# Altium PCB ECE453.PcbDoc
Units mil, origin at the board's own origin, x right, y up, seen from the top; angles counter-clockwise.
Board outline 3403.73 x 2710.03 mil, 2 copper layers (Top Layer, Bottom Layer); 33 components, 17 nets, 73 pads, 10 vias.
Unrouted connection lines stored in the file: 41.
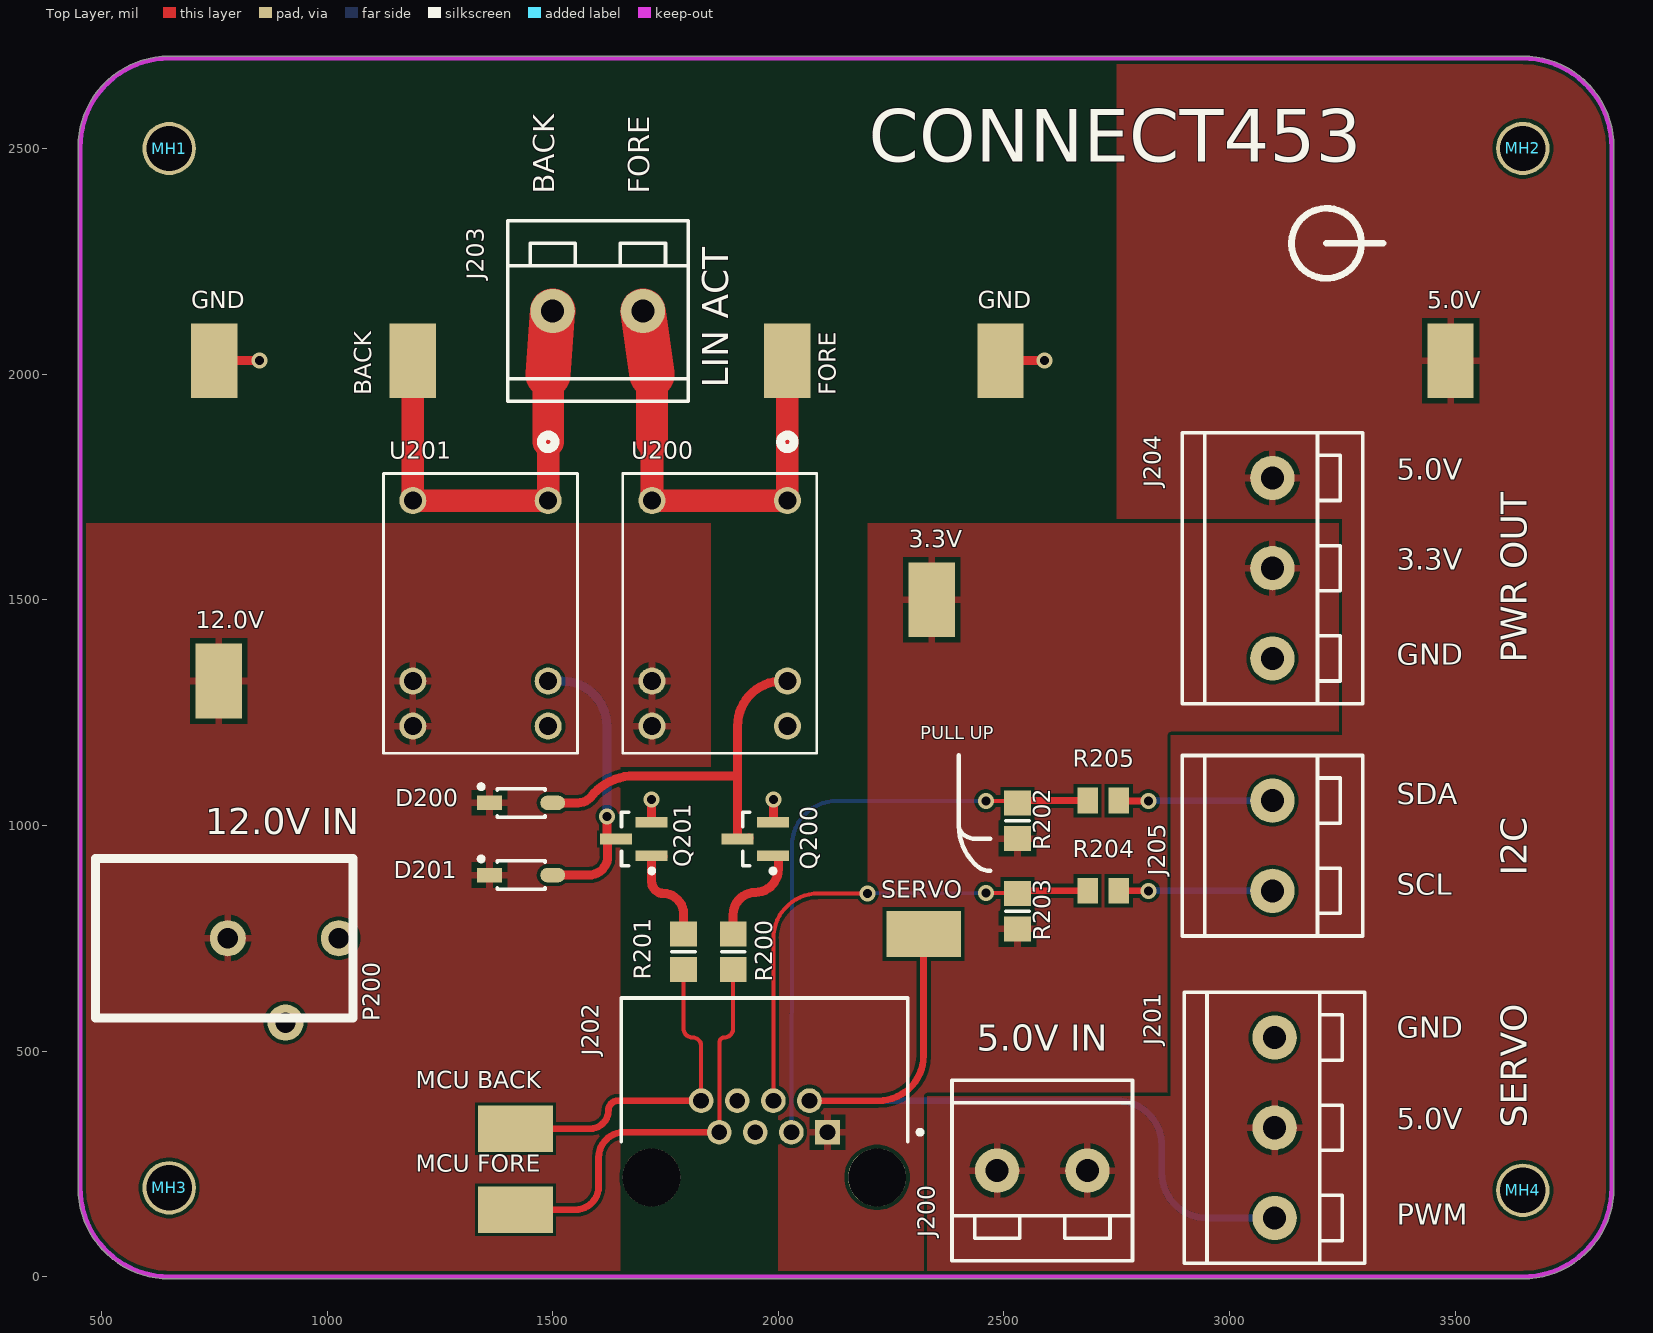
[diagram p0: Top Layer view]
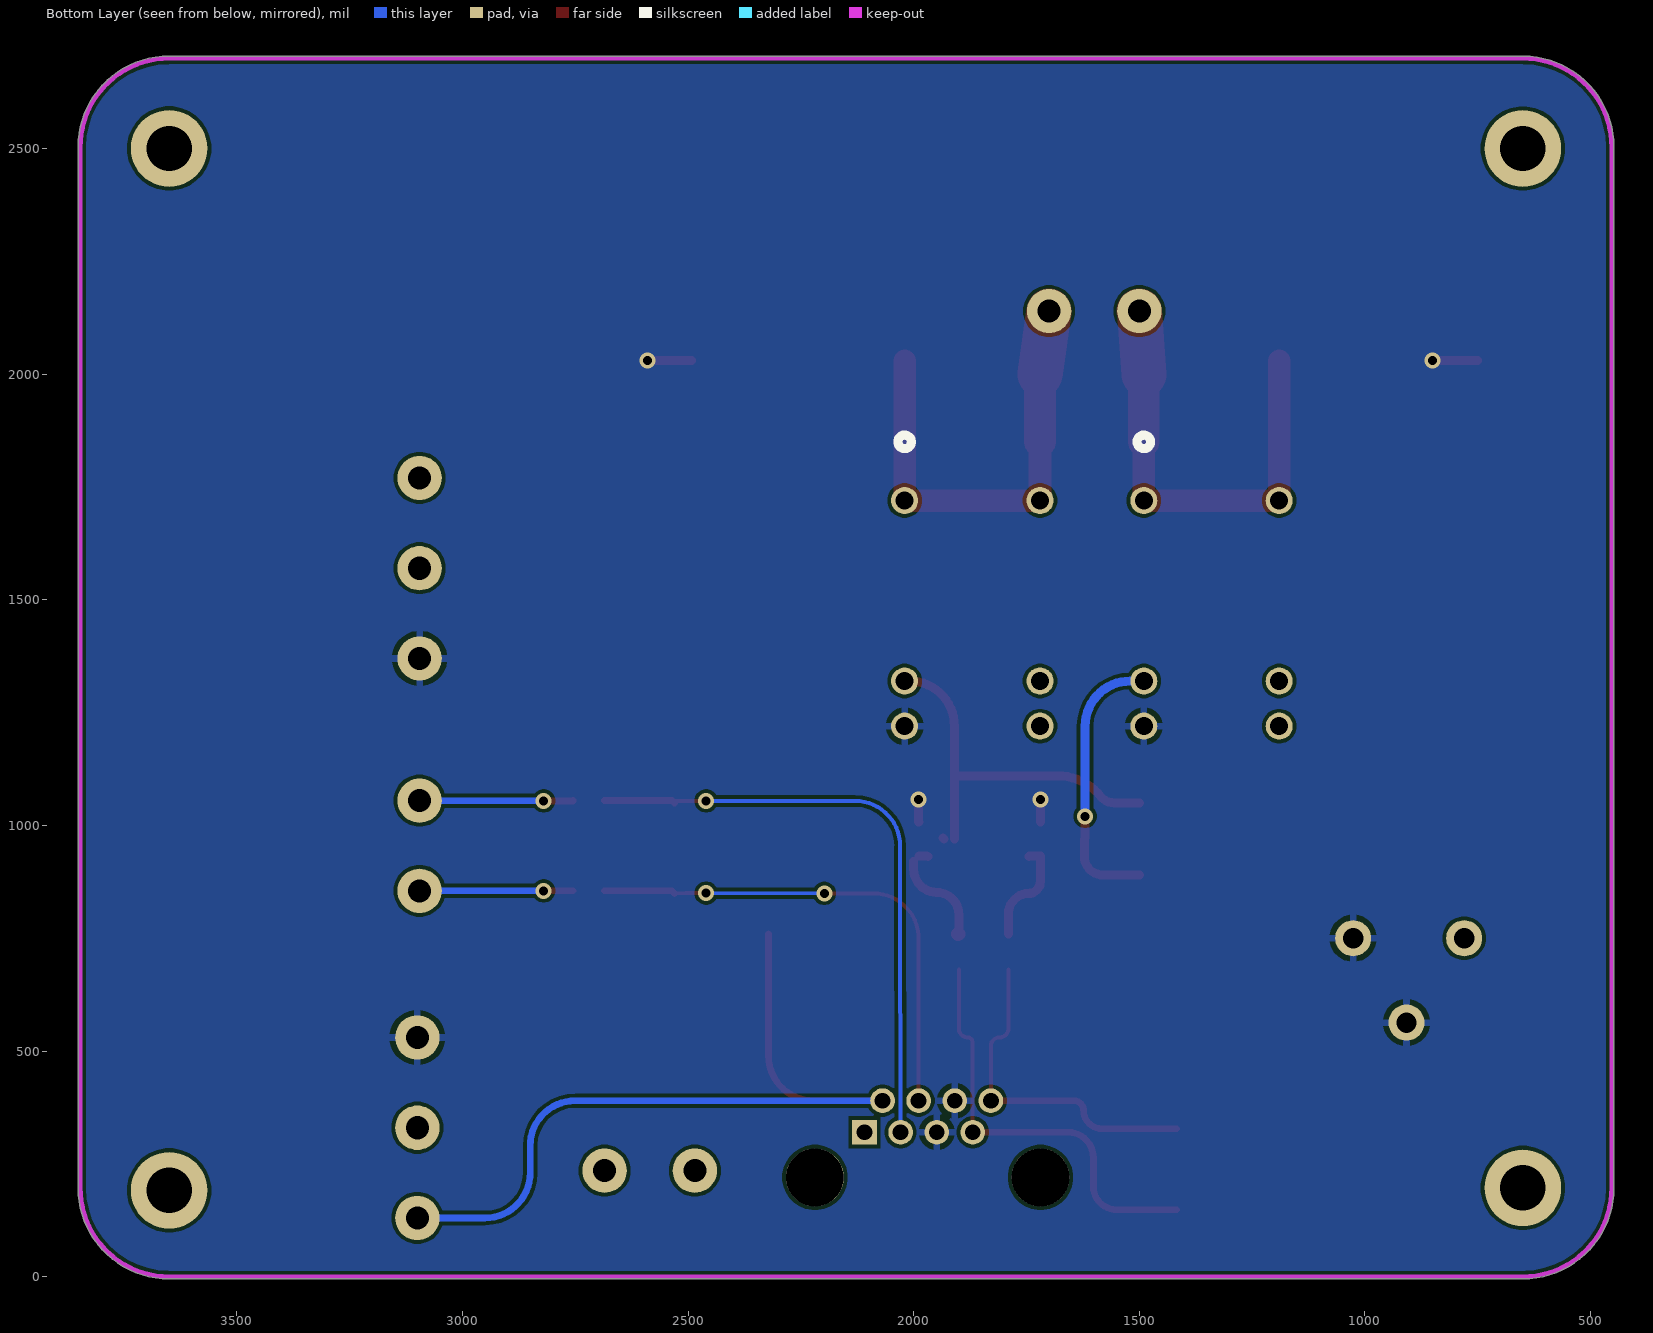
[diagram p1: Bottom Layer view, seen from below]

## Layer stack, top to bottom
Top Solder: solder mask 0.4, Solder Resist, Dk 3.5
Top Layer: signal copper 1.4
Dielectric1: dielectric 12.6, FR-4, Dk 4.8
Bottom Layer: signal copper 1.4
Bottom Solder: solder mask 0.4, Solder Resist, Dk 3.5

## Board outline
448.13,196.85 ccw(c650,196.85) 650,-5.01 3650,-5.01 ccw(c3650,196.85) 3851.87,196.85 3851.86,2503.03 3851.87,2503.15 ccw(c3650,2503.15) 3650,2705.01 650,2705.01 648.77,2704.86 ccw(c650,2503) 448.13,2503 448.18,2502.29

## Design rules (kind name [scope] priority, off if disabled: settings)
Clearance Polygon_Clearance [All vs InPolygon] p1: gap=7.87 ignorepadtopadclearanceinfootprint=FALSE
Clearance [All] p2: gap=7.87 ignorepadtopadclearanceinfootprint=TRUE
ComponentClearance [InComponent('U3')] p1: gap=0 collisioncheckmode=3 verticalgap=10 showdistances=FALSE
Height [All] p1: minheight=0 maxheight=2952.76 prefheight=500
HoleSize [All] p1: absolutevalues=TRUE maxlimit=250 minlimit=11.81 maxpercent=80.000 minpercent=20.000
MinimumAnnularRing [All] p1: minimumring=5.91
MinimumSolderMaskSliver [All] p1: minsoldermaskwidth=8.66
NetAntennae NetAntennae_5.0V [InNet('5.0V')] p1: netantennaetolerance=0
NetAntennae NetAntennae_3.3V [InNet('3.3V')] p2: netantennaetolerance=0
PlaneClearance [All] p1: clearance=11.81
PlaneConnect [All] p1: planeconnectstyle=Relief reliefexpansion=11.81 reliefentries=4 reliefconductorwidth=11.81 reliefairgap=11.81
PolygonConnect ViaConnect [All vs IsVia] p1: connectstyle=Direct reliefconductorwidth=15 reliefentries=4 polygonreliefangle="90 Angle" airgapwidth=10
PolygonConnect [All] p2: connectstyle=Relief reliefconductorwidth=15.75 reliefentries=4 polygonreliefangle="90 Angle" airgapwidth=11.81
RoutingVias [All] p1: holewidth=11.81 width=23.62 viastyle="Through Hole" minholewidth=11.81 minwidth=23.62 maxholewidth=196.85 maxwidth=393.7
SilkToSilkClearance [All] p1: silktosilkclearance=0
SilkToSolderMaskClearance [IsPad] p1: minsilkscreentomaskgap=0 clearancetoexposedcopper=TRUE
SolderMaskExpansion [All] p1: expansion=4 istentingtop=FALSE
UnConnectedPin [All] p1:
Width [All] p1: maxlimit=393.7 minlimit=7.87 preferedwidth=23.62
21 further rules are at their usual default settings.

## Classes and differential pairs
component class 04_Mechanical: MH1 MH2 MH3 MH4

## Components (designator, comment, footprint, x,y, rotation, side; value= is the part's Value field where it differs from the comment)
3.3V "TP_1206" TP-SMC-1206 2340,1500 r90 top (schematic designator TP208)
5.0V "TP_1206" TP-SMC-1206 3490,2030 r90 top (schematic designator TP207)
12.0V "TP_1206" TP-SMC-1206 760,1320 r90 top (schematic designator TP209)
BACK "TP_1206" TP-SMC-1206 1190,2030 r90 top (schematic designator TP203)
D200 "SM5817PL-TP" On_Semiconductor_425-04_IPC_A 1430,1050 r0 top
D201 "SM5817PL-TP" On_Semiconductor_425-04_IPC_A 1430,890 r0 top
FORE "TP_1206" TP-SMC-1206 2020,2030 r90 top (schematic designator TP201)
GND "TP_1206" TP-SMC-1206 750,2030 r90 top (schematic designator TP206)
GND "TP_1206" TP-SMC-1206 2492.6,2030 r90 top (schematic designator TP205)
J200 "5.0V IN" PHOENIX2X0.2 2585,235 r0 top
J201 "Servo" PHOENIX3X0.2 3100,330 r90 top
J202 "RJHSE-5080" FP-RJHSE-5080-MFG 1969,315 r0 top
J203 "Linear Actuator" PHOENIX2X0.2 1600,2140 r180 top
J204 "I2C" PHOENIX3X0.2 3095,1570 r90 top
J205 "I2C" PHOENIX2X0.2 3095,955 r90 top
"MCU BACK" "TP_1206" TP-SMC-1206 1417.57,327.87 r180 top (schematic designator TP204)
"MCU FORE" "TP_1206" TP-SMC-1206 1417.57,148.15 r180 top (schematic designator TP202)
MH1 "MHOLE_2_55MM" MHOLE_2_55MM#1 196.85,3740.16 r0 top locked
MH2 "MHOLE_2_55MM" MHOLE_2_55MM#2 3740.16,3740.16 r0 top locked
MH3 "MHOLE_2_55MM" MHOLE_2_55MM#3 196.85,196.85 r0 top locked
MH4 "MHOLE_2_55MM" MHOLE_2_55MM#4 3740.16,191.24 r0 top locked
P200 "PJ-102" PJ-102 1026.05,750 r90 top value=CP-102AD
Q200 "2N3904" SOT23-3M 1949,970 r180 top
Q201 "2N3904" SOT23-3M 1680,970 r180 top
R200 "10K" RESC2012M 1900,720 r90 top value=1K
R201 "10K" RESC2012M 1790,720 r90 top value=1K
R202 "10K" RESC2012M 2530,1010 r270 top
R203 "10K" RESC2012M 2530,810 r270 top
R204 "ERJ-6GEY0R00V" RESC2013X70X40NL20T20 2720,855 r0 top value=0R
R205 "ERJ-6GEY0R00V" RESC2013X70X40NL20T20 2720,1055 r0 top value=0R
SERVO "TP_1206" TP-SMC-1206 2321.97,759.37 r180 top (schematic designator TP200)
U200 "J1021CS312VDC.20" RELAY6_J1021CS312VDC.20_CRS 2020,1720 r270 top
U201 "J1021CS312VDC.20" RELAY6_J1021CS312VDC.20_CRS 1490,1720 r270 top

## Footprints (in the part's own frame and the unit in brackets; to place one, negate y for a bottom-side part, rotate by r counter-clockwise, add the part's x,y. Pads: shape width x height; smd on the part's side, far side on the other; paste and mask are expansions set on the pad)
FP-RJHSE-5080-MFG [mm]
  rect 1.39x1.39 hole 0.89 paste-1000 mask+0: 1(3.556,0.127)
  round 1.39 hole 0.89 paste-1000 mask+0: 2(2.54,1.905) 3(1.524,0.127) 4(0.508,1.905) 5(-0.508,0.127) 6(-1.524,1.905) 7(-2.54,0.127) 8(-3.556,1.905)
  round 3.25 hole 3.25 unplated paste-1000 mask+0: ""(-6.35,-2.413) ""(6.35,-2.413)
  silkscreen extent -8.06,-0.41 8.89,7.68, body extent -8.16,-7.78 8.16,7.78, height 0.25
MHOLE_2_55MM#1 [mm]
  round 3 / inner round 4.572 / far side round 4.318 hole 2.55: 1(11.51,-31.496)
MHOLE_2_55MM#2 [mm]
  round 3 / inner round 4.572 / far side round 4.318 hole 2.55: 1(-2.29,-31.49)
MHOLE_2_55MM#3 [mm]
  round 3 / inner round 4.572 / far side round 4.318 hole 2.55: 1(11.51,0)
MHOLE_2_55MM#4 [mm]
  round 3 / inner round 4.572 / far side round 4.318 hole 2.55: 1(-2.29,0)
On_Semiconductor_425-04_IPC_A [mm]
  rect 1.408x0.822 smd paste+0 mask+0: 1(-1.78,0)
  rrect100% 1.408x0.822 smd paste+0 mask+0: 2(1.78,0)
  silkscreen extent -2.37,-0.8 1.35,1.04, body extent -2.98,-1.3 2.98,1.3, height 0.25
PHOENIX2X0.2 [mm]
  round 2.5 hole 1.295: 1(-2.54,0) 2(2.54,0)
  silkscreen extent -5.08,-5.08 5.08,5.08, body extent -5.48,-5.59 5.48,5.71, height 18.05
PHOENIX3X0.2 [mm]
  round 2.5 hole 1.3: 1(-5.08,0) 2(0,0) 3(5.08,0)
  silkscreen extent -7.62,-5.08 7.62,5.08, body extent -7.99,-5.64 8.05,5.66, height 18.05
PJ-102 [mil]
  round 80 hole 45: 1(0,0) 2(0,246.05) 3(-187,118.1)
  silkscreen extent -177,-31 177,539, body extent -190,-20 180,547, height 435
RELAY6_J1021CS312VDC.20_CRS [mil]
  round 60 hole 40 paste-30 mask+0: 1(0,0) 5(400,0) 6(500,0) 7(0,-300) 11(400,-300) 12(500,-300)
  silkscreen extent -145,-365 560,65
RESC2012M [mm]
  rect 1.4x1.5 smd: 1(-1,0) 2(1,0)
  silkscreen extent 0,-0.65 0,0.65, body extent -1.08,-0.7 1.08,0.7, height 0.65
RESC2013X70X40NL20T20 [mm]
  rect 1.15x1.45 smd: 1(-0.875,0) 2(0.875,0)
  body extent -1.1,-0.72 1.1,0.72, height 0.7
SOT23-3M [mm]
  rect 1.8x0.6 smd mask+0.051: 1(-1,0.95) 2(-1,-0.95) 3(1,0)
  silkscreen extent -1.12,-1.5 0.7,1.92, body extent -0.7,-1.5 0.7,1.5, height 1.1
TP-SMC-1206 [mm]
  rect 4.2x2.6 smd mask+0: 1(0,0)
  body extent -1.57,-0.79 1.63,0.81, height 1.22

## Part data
3.3V 5.0V 12.0V BACK FORE GND GND "MCU BACK" "MCU FORE" SERVO: "Test Point SMD 1206", Case Size=1206, Manufacturer="TE Connectivity (Tyco Electronics)", Manufacturer Part Number=1625854-1, Operating Temperature="-55 to 125 C", Power Rating=N/R, Resistance Value="0 Ohm", Supplier Part Number=A106143CT-ND, ComponentLink1Description=https://datasheet.ciiva.com/6439/eng-ds-1773266-a-6439169.pdf, ComponentLink1URL=https://datasheet.ciiva.com/6439/eng-ds-1773266-a-6439169.pdf, ComponentLink2Description=https://datasheet.ciiva.com/30136/1773266-a-30136341.pdf, ComponentLink2URL=https://datasheet.ciiva.com/30136/1773266-a-30136341.pdf, ComponentLink3Description=https://datasheet.ciiva.com/6439/eng-ds-1773266-a-6439080.pdf, ComponentLink3URL=https://datasheet.ciiva.com/6439/eng-ds-1773266-a-6439080.pdf, ComponentLink4Description=https://datasheet.ciiva.com/6439/eng-ds-1773266-a-6439081.pdf, ComponentLink4URL=https://datasheet.ciiva.com/6439/eng-ds-1773266-a-6439081.pdf, ComponentLink5Description=https://datasheet.ciiva.com/6439/eng-ds-1773266-a-6439083.pdf, ComponentLink5URL=https://datasheet.ciiva.com/6439/eng-ds-1773266-a-6439083.pdf, Dimension="3.2 x 1.6 x 1.25mm", Family=RC, Mounting="Surface Mount", Packaging="Tape and Reel", Part No=1625854-1, Pricing 1="1=0.28, 10=0.261, 25=0.224, 50=0.1902, 100=0.1828, 250=0.1641, 500=0.1567, 1000=0.1306 (USD)", RoHS=Yes, Stock 1=31937, Supplier=Digi-Key, Temperature Coefficient=N/R, Terminal Pitch=N/R, Termination Style=N/R, Tolerance=N/R
D200 D201: "DIODE SCHOTTKY 20V 1A SOD123FL", Average Rectified Current=1A, Forward Voltage=450mV, Manufacturer 2=MCC, Max Operating Temperature=125°C, Max Reverse Voltage (DC)=20V, Max Surge Current=30A, Min Operating Temperature=-65°C, Package Quantity=1, Supplier Part Number 1=SM5817PL-TPMSCT-ND, Category="Rectifier Diodes", ComponentLink1Description=https://datasheet.ciiva.com/15200/getdatasheetpartid-487494-15200581.pdf?src-supplier=Verical, ComponentLink1URL=https://datasheet.ciiva.com/15200/getdatasheetpartid-487494-15200581.pdf?src-supplier=Verical, ComponentLink2Description=https://datasheet.ciiva.com/912/sm5817pl-sm5819plsod-123fl-912827.pdf?src-supplier=Digi-Key, ComponentLink2URL=https://datasheet.ciiva.com/912/sm5817pl-sm5819plsod-123fl-912827.pdf?src-supplier=Digi-Key, Element Configuration=Single, Manufacturer Part Number 2=SM5817PL-TP, Mount="Surface Mount", Number of Pins=2, Packaging="Tape and Reel", Peak Non-Repetitive Surge Current=30A, Pricing 2="1=0.46000, 10=0.31900, 100=0.16110, 500=0.13144, 1000=0.09752 (USD)", Radiation Hardening=No, Reverse Voltage=20V, RoHS=Yes, RoHS Compliant=Yes, Stock 2=178040, Supplier 1=Digi-Key
J200 J203 J205: library part 2-Pin, "2~24 Poles, Screw Type, Horizontal, 5.08 Pitch, 26~14 (AWG), Terminal Block Connector", Manufacturer="CUI Devices", Manufacturer Part Number=TB006-508-02BE, Supplier Part Number=102-6191-ND, Category="Terminal Blocks", ComponentLink1Description=https://datasheet.ciiva.com/709/eng-cd-640456-w1-709680.pdf?src-supplier=Digi-Key, ComponentLink1URL=https://datasheet.ciiva.com/709/eng-cd-640456-w1-709680.pdf?src-supplier=Digi-Key, ComponentLink2Description=https://datasheet.ciiva.com/3118/eng-ds-82056-mta-0608-3118497.pdf?src-supplier=Avnet, ComponentLink2URL=https://datasheet.ciiva.com/3118/eng-ds-82056-mta-0608-3118497.pdf?src-supplier=Avnet, ComponentLink3Description=https://datasheet.ciiva.com/16401/eng-ds-82056-mta-0608-16401289.pdf?src-supplier=Future+Electronics, ComponentLink3URL=https://datasheet.ciiva.com/16401/eng-ds-82056-mta-0608-16401289.pdf?src-supplier=Future+Electronics, ComponentLink4Description=https://datasheet.ciiva.com/25617/0900766b80027008-25617244.pdf?src-supplier=RSComponents, ComponentLink4URL=https://datasheet.ciiva.com/25617/0900766b80027008-25617244.pdf?src-supplier=RSComponents, ComponentLink5Description=https://datasheet.ciiva.com/14156/04384301-14156820.pdf?src-supplier=Distrelec, ComponentLink5URL=https://datasheet.ciiva.com/14156/04384301-14156820.pdf?src-supplier=Distrelec, ComponentLink6Description=https://datasheet.ciiva.com/11746/0900766b80eb7fdd-11746365.pdf?src-supplier=RSComponents, ComponentLink6URL=https://datasheet.ciiva.com/11746/0900766b80eb7fdd-11746365.pdf?src-supplier=RSComponents, ComponentLink7Description=https://datasheet.ciiva.com/7128/1866390-7128742.pdf?src-supplier=Newark, ComponentLink7URL=https://datasheet.ciiva.com/7128/1866390-7128742.pdf?src-supplier=Newark, ComponentLink8Description=https://datasheet.ciiva.com/16505/eng-ds-82056-mta-0608-16505419.pdf?src-supplier=Avnet+Asia, ComponentLink8URL=https://datasheet.ciiva.com/16505/eng-ds-82056-mta-0608-16505419.pdf?src-supplier=Avnet+Asia, Pricing 1="1=0.86, 10=0.472, 25=0.3524, 50=0.3142, 100=0.308, 250=0.27108, 500=0.24644, 1000=0.2218, 5000=0.16635 (USD)", RoHS=Yes, Stock 1=50889, Supplier=Digi-Key
J201 J204: library part 3-Pin_2, "2~24 Poles, Screw Type, Horizontal, 5.08 Pitch, 26~14 (AWG), Terminal Block Connector", Manufacturer="CUI Devices", Manufacturer Part Number=TB006-508-03BE, Supplier Part Number 1=102-6192-ND, Category="Terminal Blocks", Pricing 1="1=0.91, 10=0.567, 25=0.4856, 50=0.4364, 100=0.4272, 250=0.3636, 500=0.34542, 1000=0.30906, 5000=0.24179 (USD)", RoHS=Yes, Stock 1=41909, Supplier 1=Digi-Key
J202: library part CMP-02366-000003-1, "CONN MOD JACK 8P8C R/A UNSHLD", Contact Resistance=20mR, Current Rating=1.5A, Manufacturer=Amphenol, Max Voltage Rating (AC)=125V, Package=CONN_MOD_JACK, Supplier Part Number=28T0105, Temperature="-55°C to +85°C", Temperature Range High=+85°C, Temperature Range Low=-55°C, Automotive=No, Category=Conn, ComponentLink1Description=https://datasheet.ciiva.com/7629/1682821-7629402.pdf?src-supplier=Element14, ComponentLink1URL=https://datasheet.ciiva.com/7629/1682821-7629402.pdf?src-supplier=Element14, ComponentLink2Description=Datasheet, ComponentLink2URL=https://cdn.amphenol-icc.com/media/wysiwyg/files/documentation/datasheet/inputoutput/io-modjack-rjhse.pdf, ComponentLink3Description=https://datasheet.ciiva.com/685/rjhse5080-685586.pdf?src-supplier=Digi-Key, ComponentLink3URL=https://datasheet.ciiva.com/685/rjhse5080-685586.pdf?src-supplier=Digi-Key, ComponentLink4Description=https://datasheet.ciiva.com/1432/1693748-1432448.pdf?src-supplier=Element14, ComponentLink4URL=https://datasheet.ciiva.com/1432/1693748-1432448.pdf?src-supplier=Element14, ComponentLink5Description=https://datasheet.ciiva.com/15171/getdatasheetpartid-643190-15171163.pdf?src-supplier=Verical, ComponentLink5URL=https://datasheet.ciiva.com/15171/getdatasheetpartid-643190-15171163.pdf?src-supplier=Verical, Conn Gender=Female, Conn Orientation="Right Angle", Connector Type=RJ45, Contact Material=Gold,Nickel, Contact Plating=Gold, Depth=14.99mm, Device Class L1=Connectors, Device Class L2="Modular / Ethernet Connectors", Device Class L3=unset, Digikey Description="CONN MOD JACK 8P8C R/A UNSHLD", Footprint Url=https://cdn.amphenol-icc.com/media/wysiwyg/files/drawing/rjhse5080.pdf?__cf_chl_jschl_tk__=e349db0bbbb6188a39347cd5e541b92fa02c9719-1587748343-0-AW7tChdeHzRPLX9gSWj7WrKaXQoY9BsmT9Ek0h-T62M9y3Rs9iypFcOtkzb-6sGYQEjFE-jcoNciDETCOZrh1rYyOesac5SvYLoLwHIsHvF4AKBlx-MXmfZUVk9OTTJLqyQq2qMm0PFRLJpNcK0nrKResqOniRSYixG2sPTmOPraH-ULJFBDL602CHqcI9KKBgTq90Jh1OL2Td4moJ99rFsJRJ1Tk_uoxGe8ublcP_ARu-uLpWcQrBcwOcHDTAwL29DAwVaqcH7ta8Ks7WMlHmVl_pILeEDwT0bE9vu5Pa5S3PtNRF1leuFkgi_FMbUxTDulc5xzbXSfng8srUIV1lWXny5nx1fZJEUa_w97yKjffzBMxiWLWVN-V7-uqAaPbyv_m-wRyw5O25OZNyJOeGU, Gender=Female, Height=0.535inch, Is Female=yes, Lead Free=Yes, Length=15.75mm, Manufacturer Part Number=RJHSE-5080, Max Current Rating=1.5A, Mounting Technology="Through Hole,Panel", Mouser Description="Modular Connectors / Ethernet Connectors R/A RJ45 NONSHIELDED 8 CONT NO LEDS", Number of Contacts=8, Number of Ports=1, Number of Positions=8, Number of Positions Loaded=8, Octopart=https://octopart.com/rjhse-5080-amphenol-45060, Orientation="Right Angle", Packaging=Rail/Tube, Pitch=1.02mm, Pricing="1=0.966, 10=0.854, 25=0.808, 50=0.777, 100=0.748, 250=0.688, 500=0.627, 1000=0.568 (USD)", Radiation Hardening=No, Reach SVHC Compliant=Unknown, RoHS=TRUE, RoHS Compliant=Yes, Stock=8640, Supplier=Newark, Termination=Solder, Voltage Rating=125V, Voltage Rating (DC)=125V
MH1 MH2 MH3 MH4: "Mounting Holde", Manufacturer Part Number="UW MTHOLE"
P200: library part "CONN JACK PWR W/SW", "CONN PWR JACK 2.1X5.5MM HIGH CUR", Color=Black, Current Rating=5A, Manufacturer="CUI Inc", Manufacturer Part Number=PJ-102AH, Operating Temperature="-25°C ~ 85°C", Supplier Part Number=CP-102AH-ND, Voltage - Rated=24VDC, Connector Type=Jack, Contact Material=Copper, Contact Material - Plating=Nickel, Gender=Male, Housing Color=Black, Housing Material=Thermoplastic, Internal Switch(s)="Single Switch, Normally Closed", Mounting Type="Through Hole, Right Angle", Number of Positions/Contacts="2 Conductors, 3 Contacts", Plug/Mating Plug Diameter="2.1mm ID, 5.5mm OD", Shielding=Unshielded, Supplier=Digi-Key, Termination=Solder
Q200 Q201: "NPN General Purpose Amplifier", Current - Collector (Ic) (Max)=200mA, Current - Collector Cutoff (Max)="50nA (ICBO)", DC Current Gain (hFE) (Min) @ Ic, Vce="100 @ 10mA, 1V", Frequency - Transition=300MHz, Manufacturer="Diodes Incorporated", Manufacturer Part Number=MMBT3904-7-F, Package / Case="TO-236-3, SC-59, SOT-23-3", Power - Max=300mW, Supplier Device Package=SOT-23-3, Supplier Part Number=MMBT3904-FDICT-ND, Voltage - Collector Emitter Breakdown (Max)=40V, Category="Discrete Semiconductor Products", Mounting Type="Surface Mount", Packaging="Cut Tape (CT)", RoHS="RoHS Compliant", Supplier=Digi-Key, Transistor Type=NPN, Vce Saturation (Max) @ Ib, Ic="300mV @ 5mA, 50mA"
R200 R201: library part Res3_1, "Res Thick Film 0805 1K Ohm 1% 0.125W(1/8W) ±100ppm/C Pad SMD Automotive T/R", Case Code (Imperial)=0805, Case Code (Metric)=2012, Manufacturer="Stackpole Electronics", Manufacturer Part Number=RMCF0805FT1K00, Max Operating Temperature=155°C, Max Power Dissipation=125mW, Min Operating Temperature=-55°C, Resistor Type="Thick Film", Supplier Part Number 1=RMCF0805FT1K00CT-ND, Temperature Coefficient=100ppm/°C, Tolerance=1%, Case/Package=0805, Category="Chip SMD Resistors", ComponentLink1Description=https://datasheet.ciiva.com/15193/getdatasheetpartid-360136-15193546.pdf?src-supplier=Verical, ComponentLink1URL=https://datasheet.ciiva.com/15193/getdatasheetpartid-360136-15193546.pdf?src-supplier=Verical, Construction=Rectangular, Contact Plating=Tin,Matte, Depth=1.25mm, Features="Automotive AEC-Q200", Height=0.026inch, Lead Free="Lead Free", Length=2mm, Military Standard=Not, Mounting Technology="Surface Mount", Number of Terminations=2, Packaging="Tape and Reel", Power Rating=125mW, Pricing 1="1=0.10000, 10=0.02400, 100=0.00970, 1000=0.00437, 2500=0.00379 (USD)", Radiation Hardening=No, RoHS=Yes, RoHS Compliant=Yes, Series=RMCF, Stock 1=2773085, Supplier 1=Digi-Key, Width=0.049inch
R202 R203: library part Res3, "Res Thick Film 0805 10K Ohm 1% 0.125W ±100ppm/°C Molded SMD Paper T/R", Case Code (Imperial)=0805, Case Code (Metric)=2012, Manufacturer="Stackpole Electronics", Manufacturer Part Number=RMCF0805FT10K0, Max Operating Temperature=155°C, Max Power Dissipation=125mW, Min Operating Temperature=-55°C, Resistor Type="Thick Film", Supplier Part Number 1=RMCF0805FT10K0CT-ND, Temperature Coefficient=100ppm/°C, Tolerance=1%, Case/Package=0805, Category="Chip SMD Resistors", ComponentLink1Description=https://datasheet.ciiva.com/15193/getdatasheetpartid-362046-15193525.pdf?src-supplier=Verical, ComponentLink1URL=https://datasheet.ciiva.com/15193/getdatasheetpartid-362046-15193525.pdf?src-supplier=Verical, Construction=Rectangular, Contact Plating=Tin,Matte, Depth=1.25mm, Features="Automotive AEC-Q200", Height=0.026inch, Lead Free="Lead Free", Length=2mm, Military Standard=Not, Mounting Technology="Surface Mount", Number of Terminations=2, Packaging="Tape and Reel", Power Rating=125mW, Pricing 1="1=0.10000, 10=0.02400, 100=0.00970, 1000=0.00437, 2500=0.00379 (USD)", Radiation Hardening=No, RoHS=Yes, RoHS Compliant=Yes, Series=RMCF, Stock 1=3732463, Supplier 1=Digi-Key, Width=0.049inch
R204 R205: library part CMP-1665-00002-5, "Chip Resistor, 0 Ohm, +/- 1%, 0.125 W, -55 to 155 degC, 0805 (2012 Metric), RoHS, Tape and Reel", Case Code (Imperial)=0805, Case Code (Metric)=2012, Current Rating=2A, Manufacturer=Panasonic, Max Operating Temperature="155 degC", Max Power Dissipation=125mW, Min Operating Temperature="-55 degC", Package Quantity=5000, Ratings=AEC-Q200, Resistance="0 Ohm", Resistor Type="Thick Film", Supplier Part Number=65T8846, Temperature Coefficient=600ppm/°C, Tolerance=5%, Voltage Rating=150V, Case/Package=0805, Category="Chip SMD Resistors", ComponentLink1Description="Manufacturer URL", ComponentLink1URL=http://www.panasonic.com/, ComponentLink2Description=Datasheet, ComponentLink2URL=http://industrial.panasonic.com/cdbs/www-data/pdf/RDA0000/AOA0000C84.pdf, Construction=Rectangular, Contact Plating=Tin, DatasheetVersion=03/2015, Depth=1.25mm, Features="Automotive AEC-Q200", Height="0.6 mm", Lead Free="Lead Free", Length="2 mm", Manufacturer Part Number=ERJ-6GEY0R00V, Military Standard=Not, Mounting Technology="Surface Mount", Number of Terminations=2, PackageDescription="2-Pin Surface Mount Device, Body 2 x 1.25 mm", Packaging="Tape and Reel", PartNumber=ERJ-6GEY0R00V, Power Rating=125mW, Pricing="1=0.008, 25=0.008, 50=0.008, 100=0.008, 250=0.008, 500=0.008, 1000=0.008 (USD)", Radiation Hardening=No, REACH SVHC="No SVHC", Reach SVHC Compliant=No, RoHS=Yes, RoHS Compliant=Yes, RoHSCompliant=True, Series=ERJ, Stock=200593, Supplier=Newark, Technology="THICK FILM", Termination=SMD/SMT, Voltage Rating (DC)=150V, Width="1.25 mm"
U200 U201: "No Description Available", Mfr_Name="CIT Relay & Switch", Copyright="Copyright (C) 2023 Ultra Librarian. All rights reserved.", Manufacturer_Part_Number=J1021CS312VDC.20, RefDes=RefDes, Type=DEV

## Via types
v1: diameter 35.43, hole 19.68, Top Layer to Bottom Layer, 10 vias

## Nets (pads, with @x,y where several pads share a name; then routed paths per layer and width w, separated by ;. In a path a pad name is that pad's centre, name@x,y a point inside that pad or via, vN(x,y) a via of type N, cw(c..) or ccw(c..) an arc to the next point about the centre after c; other vN are vias at no path point)
3.3V: 3.3V.1 J202.1 J204.2 R202.2 R203.2
5.0V: 5.0V.1 J200.1 J200.2 J201.2 J204.3
12.0V: 12.0V.1 D200.1 D201.1 P200.2 U200.11 U200.12 U201.11 U201.12
Base_back: Q201.1 R201.2 | length 239.7
  Top Layer w20: Q201.1@1744.8,930.79 1742.99,932.6 Q201.1 1719.37,874.8 ccw(c1744.8,874.8) 1744.8,849.37 cw(c1744.8,804.17) 1790,804.17 R201.2
Base_fore: Q200.1 R200.2 | length 240.3
  Top Layer w20: R200.2 1900,802.63 cw(c1949,802.63) 1949,851.63 ccw(c1949,902.63) 2000,902.63 2000,920 ; Q200.1@1968.5,930.79 1970.31,932.6 Q200.1
  Top Layer w30: R200.2 R200.2@1901.97,759.37
Coll_back: D201.2 Q201.3 U201.5 | length 622.1
  Top Layer w20: D201.2 1579.63,890 ccw(c1579.63,933.12) 1610.12,902.63 ccw(c1581.9,930.85) 1621.81,930.85 1621.81,970 1620,971.81 v1(1620,1020)
  Top Layer w30: U201.5@1490,1319.68 U201.5
  Bottom Layer w20: U201.5 1520,1320 cw(c1520,1220) 1620,1220 v1(1620,1020)
Coll_fore: D200.2 Q200.3 U200.5 | length 848
  Top Layer w20: D200.2 1556.06,1050 ccw(c1556.06,1087.93) 1582.88,1061.11 cw(c1681.51,986.06) 1681.51,1110 1909.63,1110 ; Q200.3 1909.63,1110 ; Q200.3@1933.25,970 Q200.3@1935.06,971.81 ; U200.5 2009.63,1320 ccw(c2009.63,1220) 1909.63,1220 1909.63,1110
GND: GND.1 J201.3 J202.5 J202.6 J204.1 P200.1 P200.3 Q200.2 Q201.2 U200.6 U201.6 | length 299.1
  Top Layer w20: GND.1@750,2030 v1(850,2030) ; v1(1719,1057.74) 1719,1007.4 Q201.2 ; Q200.2 1989,1007.4 v1(1989,1057.74) ; GND.1@2492.6,2030 v1(2590,2030)
I2C_SCL: J202.4 R203.1 R204.1 | length 1115.3
  Top Layer w9: J202.4 1989,749.37 cw(c2089,749.37) 2089,849.37 v1(2198.04,849.37) ; v1(2460,850) 2504.97,850 R203.1
  Top Layer w15: R203.1 2535.63,855 R204.1
  Bottom Layer w9: v1(2198.04,849.37) v1(2460,850)
I2C_SDA: J202.3 R202.1 R205.1 | length 1352.2
  Top Layer w9: v1(2460,1054.37) 2525,1054.37 cw(c2525,1049.37) R202.1
  Top Layer w15: R202.1 2535.63,1055 R205.1
  Bottom Layer w9: J202.3 2029.99,846.16 2029.99,954.37 cw(c2129.99,954.37) 2129.99,1054.37 v1(2460,1054.37)
Lin_back: BACK.1 J203.2 U201.1 U201.7 | length 1041.8
  Top Layer w50: BACK.1 U201.7 U201.1 1490,1850 ; J203.2@1491.91,2131.91 J203.2
  Top Layer w70: 1490,1850 1490,1998.48
  Top Layer w100: 1490,1998.48 J203.2
Lin_fore: FORE.1 J203.1 U200.1 U200.7 | length 1044.5
  Top Layer w50: J203.1@1700,2126.9 J203.1 ; 1720,1850 U200.7 U200.1 FORE.1
  Top Layer w70: 1720,1850 1720,1998.48
  Top Layer w100: J203.1 1719.92,1999.07 1720,1998.48
MCU_back: "MCU BACK.1" J202.8 R201.1 | length 759.8
  Top Layer w9: R201.1 1790,550 ccw(c1810,550) 1810,530 cw(c1810,511) 1829,511 J202.8
  Top Layer w15: 1417.57,327.87 1582.88,327.87 ccw(c1582.88,368.36) 1623.37,368.36 cw(c1645,368.36) 1645,390 J202.8
MCU_fore: "MCU FORE.1" J202.7 R200.1 | length 955.4
  Top Layer w9: J202.7 ccw(c1869,321) 1870,321 1870,381.56 ccw(c1861,381.56) 1869.86,383.14 cw(c1909,390) 1869.87,396.89 ccw(c1861,398.44) 1870,398.44 1870,520 cw(c1880,520) 1880,530 ccw(c1880,550) 1900,550 R200.1
  Top Layer w15: 1417.57,148.15 1550,148.15 ccw(c1550,199.93) 1601.78,199.93 1601.78,263.91 cw(c1657.87,263.91) 1657.87,320 J202.7
MCU_servo: J201.1 J202.2 SERVO.1 | length 1784.6
  Top Layer w15: J202.2 2221.97,390 ccw(c2221.97,490) 2321.97,490 SERVO.1
  Bottom Layer w15: J202.2 2750,390 cw(c2750,290) 2850,290 2850,230 ccw(c2950,230) 2950,130 J201.1
SCL_R: J205.1 R204.2 | length 340.6
  Top Layer w15: R204.2 v1(2820,855)
  Bottom Layer w15: v1(2820,855) J205.1
SDA_R: J205.2 R205.2 | length 341.1
  Top Layer w15: R205.2 2755.08,1054.37 v1(2820,1054.37)
  Bottom Layer w15: v1(2820,1054.37) 2820.31,1054.68 3094.68,1054.68 J205.2
pads on no net: J202. MH1.1 MH2.1 MH3.1 MH4.1

## Polygon pours and split planes (outlines as drawn)
12.0V on Top Layer "12.0V_L01_P008" (solid, pour order 8): 1850,1130 1650,1130 1650,0 607.34,0 530,37.61 483.26,84.92 467.98,129.92 448.18,203.44 460,1670 1850,1670
3.3V on Top Layer "3.3V_L01_P007" (solid, pour order 7): 2000,794.97 2025.11,820.08 cw(c2095.82,749.37) 2095.83,849.37 2198.04,849.37 2198.04,1670 2750,1670 3250,1670 3250,1200 2870,1200 2870,400 2330,400 2330,0 2000,0 2000,620
5.0V on Top Layer "5.0V_L01_P006" (solid, pour order 6): 3700,0 3760,30 3820,94.95 3850,165.05 3850,2510 3830,2590 3790,2640 3700,2700 2750,2700 2750,1680 3250,1680 3250,1200 2870,1200 2870,400 2330,400 2330,0
GND on Bottom Layer "B_GND" (solid, remove dead copper, pour order 5): 448.19,2700 448.19,2570 460,0 3851.86,0 3851.86,2700

## Keep-outs
Keep-Out Layer:
  lines w10: 453.15,196.85 ccw(c650,196.85) 650,0 3650,0 ccw(c3650,196.85) 3846.85,196.85 3846.85,2503 ccw(c3650,2503) 3650,2699.85 ; 453.15,2503 cw(c650,2503) 650,2699.85 ; 453.2,196.87 453.2,2503.16 ; 650,2700 3650,2700

## Silkscreen, mask and mechanical layers (free items; w line width, h text height)
Top Overlay:
  circle w15: c3215,2290 r77.62
  lines w10: 2400,1155 2400,1000 ; 2470,899.13 cw(c2470,945.33) 2437.34,912.66 2435.36,914.64 cw(c2520.71,1000) 2400,1000 ; 2470,970 2438.28,970 cw(c2438.28,1014.14) 2407.07,982.93 cw(c2424.14,1000) 2400,1000
  lines w15: 3215,2290 3340,2290
  text "CONNECT453" at 2200,2432.22 h200
  text "BACK" at 1519.14,2400.03 h80 r90
  text "FORE" at 1729.14,2400 h80 r90
  text "LIN ACT" at 1908.92,1970.03 h100 r90
  text "5.0V" at 3370.03,1750.09 h80
  text "3.3V" at 3370.03,1550.86 h80
  text "PWR OUT" at 3678.92,1360.03 h100 r90
  text "GND" at 3370,1340.86 h80
  text "PULL UP" at 2314.08,1180.54 h50
  text "SDA" at 3370.06,1030.89 h80
  text "12.0V IN" at 730.03,960.59 h100
  text "I2C" at 3678.92,888.99 h100 r90
  text "SCL" at 3370.06,830.89 h80
  text "GND" at 3370,514.01 h80
  text "5.0V IN" at 2440.03,481.08 h100
  text "SERVO" at 3678.89,330 h100 r90
  text "5.0V" at 3370.06,310.86 h80
  text "PWM" at 3370.03,100 h80
Mechanical 2:
  lines w10: 453.15,196.85 ccw(c650,196.85) 650,0 3650,0 ccw(c3650,196.85) 3846.85,196.85 3846.85,2503.03 ; 453.15,2503 cw(c650,2503) 650,2699.85 ; 453.2,196.85 453.2,2504 ; 650,2700 3650,2700 cw(c3650,2503.15) 3846.85,2503.15 ; 196.85,0 196.85,0